# Altium PCB HIVE_SIGHT.PcbDoc (part 2 of 2)
Units mil, origin at the board's own origin, x right, y up, seen from the top; angles counter-clockwise.
Board outline 5769.33 x 2559.52 mil, 8 copper layers (Top, GND_1, Signal_1, GND_2, PWR, Signal_2, GND_3, Bottom), stack 52.4 mil thick; 132 components, 137 nets, 371 pads, 0 vias.
Unrouted connection lines stored in the file: 245.
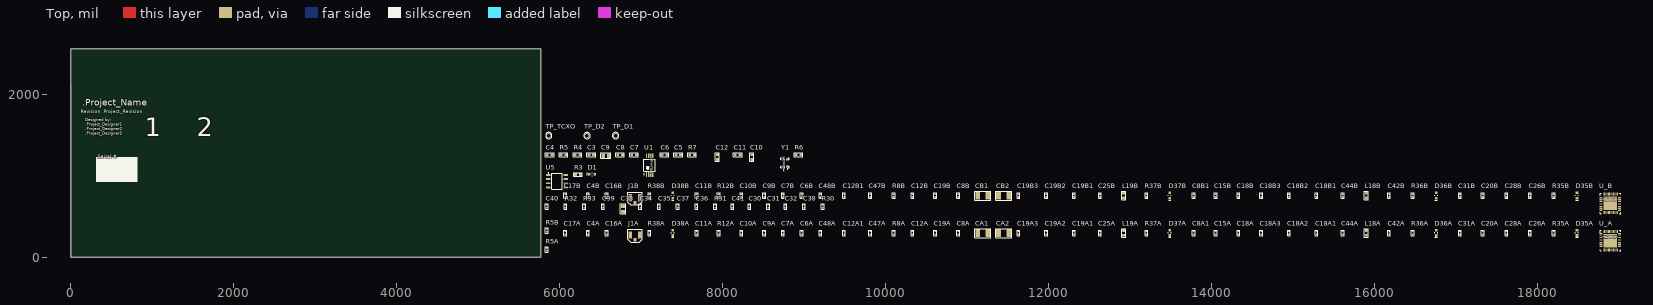
[diagram p0: Top view]

## Polygon pours and split planes (outlines as drawn) (continued)
no net on GND_3 (split plane): 5749.23,20.1 20.1,20.1 20.1,2538.96 5749.23,2539.42

## Keep-outs
Keep-Out Layer:
  lines w10: 2.34,2120.42 2.34,0.42 5252.34,0.42

## Silkscreen, mask and mechanical layers (free items; w line width, h text height)
Top Overlay:
  rectangle: 308.85,928.06 817.44,1231.32
  text ".Project_Name" at 136.94,1861.8 h78.74
  text "Revision .Project_Revision" at 123.95,1770.86 h40
  text "Designed by: / .Project_Designer1 / .Project_Designer2 / .Project_Designer3" at 177.23,1507.77 h36
  text "1" at 904.54,1408.14 h393.7
  text "2" at 1542.82,1406.36 h393.7
  text "Serial #" at 331,1215.98 h39.37
Board Outline:
  the board outline again, w10

## Text inside footprints (layer, text, board x,y; h text height)
U1: Top Overlay "PRELIMINARY" at 7139.75,1030.98 h19.68 r90
U_A: Top Overlay "PRELIMINARY" at 18800.85,234.87 h19.68
U_B: Top Overlay "PRELIMINARY" at 18800.85,692.87 h19.68
Y1: Top Overlay "PRELIMINARY" at 8778.16,1053.04 h39.37 r90